# Altium PCB PCB.PcbDoc
Units mm, origin at the board's own origin, x right, y up, seen from the top; angles counter-clockwise.
Board outline 13.46 x 23.62 mm, 2 copper layers (Top Layer, Bottom Layer); 5 components, 18 nets, 53 pads, 1 vias.
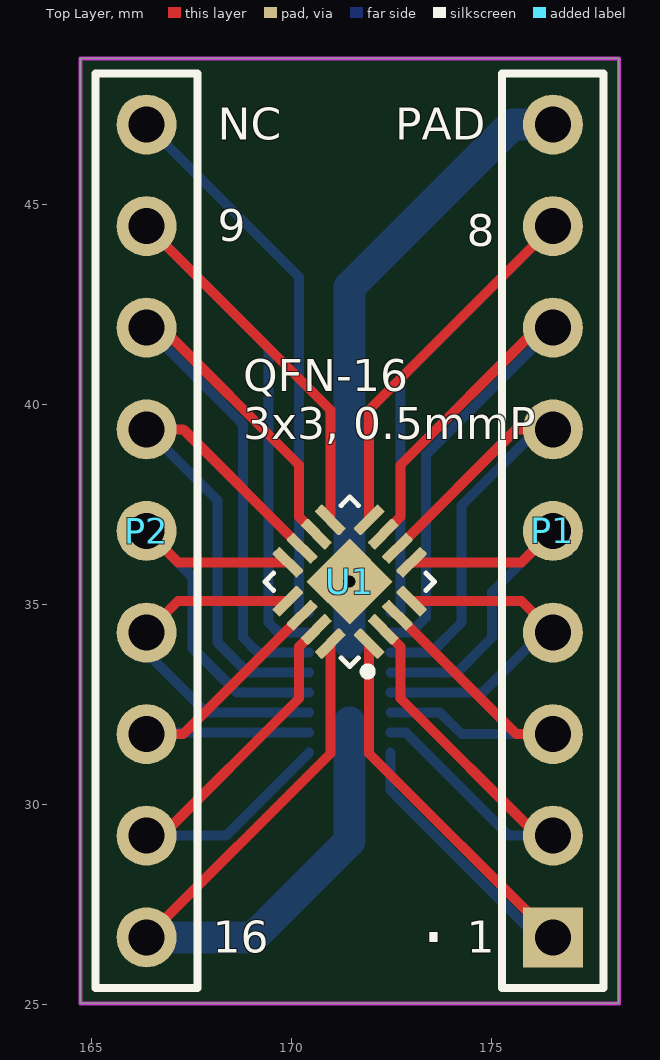
[diagram p0: Top Layer view]
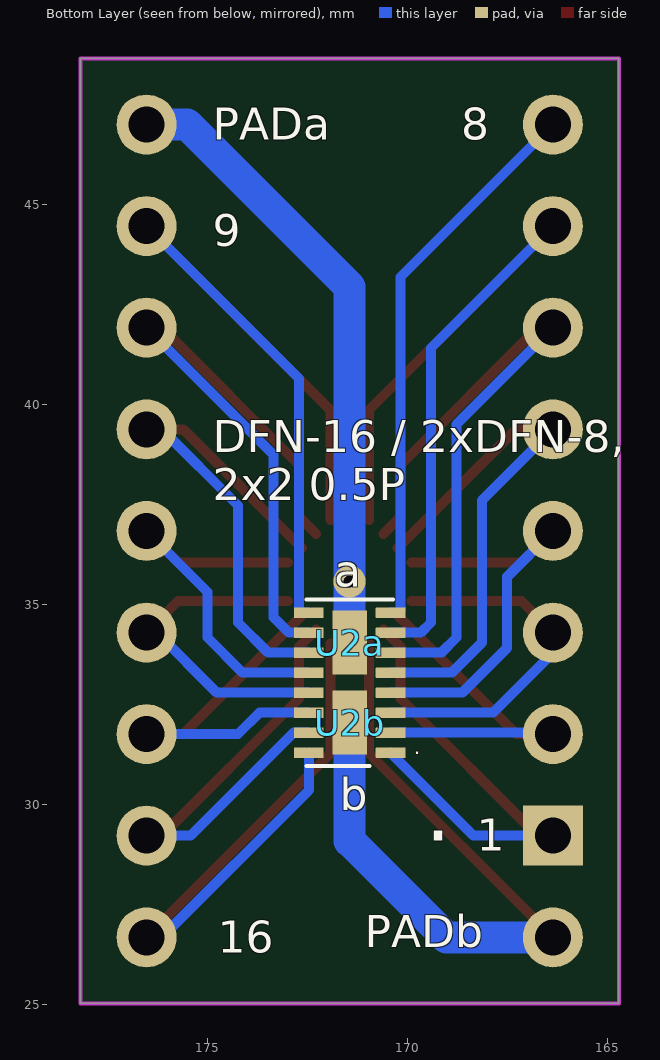
[diagram p1: Bottom Layer view, seen from below]

## Layer stack, top to bottom
Top Solder: solder mask 0.0102, Solder Resist, Dk 3.5
Top Layer: signal copper 0.0356
Dielectric 1: dielectric 0.32, FR-4, Dk 4.8
Bottom Layer: signal copper 0.0356
Bottom Solder: solder mask 0.0102, Solder Resist, Dk 3.5

## Board outline
164.719,48.641 178.181,48.641 178.181,25.019 164.719,25.019

## Design rules (kind name [scope] priority, off if disabled: settings)
Clearance [All] p1: gap=0.152 ignorepadtopadclearanceinfootprint=FALSE except(0: Arc-Hole Track-Hole SMDPad-Hole THPad-Hole Via-Hole Fill-Hole Poly-Hole Region-Hole Text-Hole)
HoleSize [All] p1: absolutevalues=TRUE maxlimit=6.2 minlimit=0.3 maxpercent=80.000 minpercent=20.000
MinimumSolderMaskSliver [All] p1: minsoldermaskwidth=0.1
PolygonConnect ViaConnect [IsVia] p1: connectstyle=Direct reliefconductorwidth=0.254 reliefentries=4 polygonreliefangle="90 Angle" airgapwidth=0.254
PolygonConnect [All] p2: connectstyle=Relief reliefconductorwidth=0.254 reliefentries=4 polygonreliefangle="90 Angle" airgapwidth=0.254
RoutingVias [All] p1: holewidth=0.3 width=0.6 viastyle="Through Hole" minholewidth=0.3 minwidth=0.5 maxholewidth=1 maxwidth=5
SilkToSilkClearance [All] p1: silktosilkclearance=0.1
SilkToSolderMaskClearance [IsPad] p1: minsilkscreentomaskgap=0.1 clearancetoexposedcopper=TRUE
SolderMaskExpansion [All] p1: expansion=0.051 istentingtop=FALSE
Width [All] p1: maxlimit=25.4 minlimit=0.15 preferedwidth=0.25
26 further rules are at their usual default settings.

## Components (designator, comment, footprint, x,y, rotation, side; value= is the part's Value field where it differs from the comment)
P1 "" HDR1X9#1 176.53,26.67 r90 top locked
P2 "" HDR1X9#2 166.37,46.99 r270 top
U1 "QFN-16-placeholder" QFN50P300X300X100-17N 171.45,35.56 r135 top
U2a "DFN-8-placeholder" SON50P200X200X60-9N 171.45,34.036 r0 bottom
U2b "DFN-8-placeholder" SON50P200X200X60-9N 171.45,32.036 r0 bottom

## Footprints (in the part's own frame and the unit in brackets; to place one, negate y for a bottom-side part, rotate by r counter-clockwise, add the part's x,y. Pads: shape width x height; smd on the part's side, far side on the other; paste and mask are expansions set on the pad)
HDR1X9#1 [mm] "Connector; Header; 9 Position"
  rect 1.5x1.5 / inner rect 1.5x1.5 / far side round 1.5 hole 0.9: 1(0,0)
  round 1.5 hole 0.9: 2(2.54,0) 3(5.08,0) 4(7.62,0) 5(10.16,0) 6(12.7,0) 7(15.24,0) 8(17.78,0) 9(20.32,0)
  silkscreen extent -1.27,-1.27 21.59,1.27
HDR1X9#2 [mm] "Connector; Header; 9 Position"
  round 1.5 / inner rect 1.5x1.5 / far side round 1.5 hole 0.9: 1(0,0)
  round 1.5 hole 0.9: 2(2.54,0) 3(5.08,0) 4(7.62,0) 5(10.16,0) 6(12.7,0) 7(15.24,0) 9(20.32,0)
  round 1.5 / inner round 1.5 / far side rect 1.5x1.5 hole 0.9: 8(17.78,0)
  silkscreen extent -1.27,-1.27 21.59,1.27
QFN50P300X300X100-17N [mm]
  rrect25% 0.86x0.26 smd mask+0.051: 1(-1.435,0.75) 2(-1.435,0.25) 3(-1.435,-0.25) 4(-1.435,-0.75) 9(1.435,-0.75) 10(1.435,-0.25) 11(1.435,0.25) 12(1.435,0.75)
  rrect25% 0.26x0.86 smd mask+0.051: 5(-0.75,-1.435) 6(-0.25,-1.435) 7(0.25,-1.435) 8(0.75,-1.435) 13(0.75,1.435) 14(0.25,1.435) 15(-0.25,1.435) 16(-0.75,1.435)
  rect 1.524x1.524 smd paste-0.31 mask+0.051: 17(0,0)
  silkscreen extent -2,-1.5 1.5,1.5, body extent -1.5,-1.5 1.5,1.5, height 1
SON50P200X200X60-9N [mm]
  rrect7% 0.74x0.26 smd mask+0.051: 1(-1.02,0.75) 2(-1.02,0.25) 3(-1.02,-0.25) 4(-1.02,-0.75) 5(1.02,-0.75) 6(1.02,-0.25) 7(1.02,0.25) 8(1.02,0.75)
  rect 0.864x1.6 smd mask+0.051: 9(0,0)
  silkscreen extent -1.08,-1.08 1.08,-1.08, body extent -1,-1 1,1, height 0.6

## Part data
P1 P2: library part "Header 9", "Header, 9-Pin", LatestRevisionDate=17-Jul-2002, LatestRevisionNote="Re-released for DXP Platform.", Publisher="Altium Limited"

## Via types
v1: diameter 0.8, hole 0.3, Top Layer to Bottom Layer, tented bottom, 1 vias

## Nets (pads, with @x,y where several pads share a name; then routed paths per layer and width w, separated by ;. In a path a pad name is that pad's centre, name@x,y a point inside that pad or via, vN(x,y) a via of type N, cw(c..) or ccw(c..) an arc to the next point about the centre after c; other vN are vias at no path point)
1: P1.1 U1.1 U2b.8 | length 15.8
  Top Layer w0.25: U1.1 171.934,31.266 P1.1
  Bottom Layer w0.25: U2b.8 172.47,30.349 176.149,26.67 P1.1
2: P1.2 U1.2 U2b.7 | length 12.3
  Top Layer w0.25: U1.2 172.72,33.936 172.72,32.639 176.149,29.21 P1.2
  Bottom Layer w0.25: U2b.7 172.857,31.786 175.433,29.21 P1.2
3: P1.3 U1.3 U2b.6 | length 9.4
  Top Layer w0.25: U1.3 175.614,31.75 P1.3
  Bottom Layer w0.25: U2b.6 173.708,32.286 174.244,31.75 P1.3
4: P1.4 U1.4 U2b.5 | length 8.5
  Top Layer w0.25: U1.4 175.744,35.076 P1.4
  Bottom Layer w0.25: U2b.5 174.772,32.786 176.276,34.29 P1.4
5: P1.5 U1.5 U2a.8 | length 10.1
  Top Layer w0.25: U1.5 175.744,36.044 P1.5
  Bottom Layer w0.25: U2a.8 174.129,33.286 175.006,34.163 175.006,35.306 P1.5
6: P1.6 U1.6 U2a.7 | length 13.2
  Top Layer w0.25: U1.6 175.614,39.37 P1.6
  Bottom Layer w0.25: U2a.7 173.486,33.786 174.244,34.544 174.244,37.465 176.149,39.37 P1.6
7: P1.7 U1.7 U2a.6 | length 16.7
  Top Layer w0.25: U1.7 172.72,37.184 172.72,38.481 176.149,41.91 P1.7
  Bottom Layer w0.25: U2a.6 172.97,34.286 173.355,34.671 173.355,38.735 P1.7
8: P1.8 U1.8 U2a.5 | length 20.7
  Top Layer w0.25: U1.8 171.934,39.854 P1.8
  Bottom Layer w0.25: U2a.5 172.708,34.786 172.72,34.798 172.72,40.64 P1.8
9: P1.9 U1.17 U2a.9 | length 15.7
  Bottom Layer w0.8: U2a.9 v1(171.45,35.56) 171.45,42.926 175.514,46.99 P1.9
10: P2.1 U2a.4 | length 14
  Bottom Layer w0.25: P2.1 170.18,43.18 170.18,34.798 170.192,34.786 U2a.4
11: P2.2 U1.9 U2a.3 | length 21.5
  Top Layer w0.25: P2.2 170.966,39.854 U1.9
  Bottom Layer w0.25: P2.2 169.418,41.402 169.418,34.544 169.676,34.286 U2a.3
12: P2.3 U1.10 U2a.2 | length 17.7
  Top Layer w0.25: P2.3 166.751,41.91 170.18,38.481 170.18,37.184 U1.10
  Bottom Layer w0.25: P2.3 168.783,39.497 168.783,34.163 169.16,33.786 U2a.2
13: P2.4 U1.11 U2a.1 | length 13.8
  Top Layer w0.25: P2.4 167.286,39.37 U1.11
  Bottom Layer w0.25: P2.4 168.148,37.592 168.148,34.036 168.898,33.286 U2a.1
14: P2.5 U1.12 U2b.4 | length 10.6
  Top Layer w0.25: P2.5 167.156,36.044 U1.12
  Bottom Layer w0.25: P2.5 167.513,35.687 167.513,33.909 168.636,32.786 U2b.4
15: P2.6 U1.13 U2b.3 | length 9
  Top Layer w0.25: P2.6 167.156,35.076 U1.13
  Bottom Layer w0.25: P2.6 166.37,33.782 167.866,32.286 U2b.3
16: P2.7 U1.14 U2b.2 | length 9.2
  Top Layer w0.25: P2.7 167.286,31.75 U1.14
  Bottom Layer w0.25: P2.7 166.406,31.786 U2b.2
17: P2.8 U1.15 U2b.1 | length 12.1
  Top Layer w0.25: P2.8 166.751,29.21 170.18,32.639 170.18,33.936 U1.15
  Bottom Layer w0.25: P2.8 168.354,29.21 U2b.1
18: P2.9 U1.16 U2b.9 | length 18.3
  Top Layer w0.25: P2.9 170.966,31.266 U1.16
  Bottom Layer w0.8: P2.9 169.037,26.67 171.45,29.083 U2b.9

## Keep-outs
Keep-Out Layer:
  the board outline again, w0.1

## Silkscreen, mask and mechanical layers (free items; w line width, h text height)
Top Overlay:
  text "NC" at 168.148,46.609 h0.8
  text "PAD" at 172.593,46.609 h0.8
  text "9" at 168.148,44.069 h0.8
  text "8" at 174.371,43.942 h0.8
  text "QFN-16  / 3x3, 0.5mmP" at 168.783,39.116 h0.8
  text "." at 173.228,26.543 h1.5
  text "16" at 168.021,26.289 h0.8
  text "1" at 174.371,26.289 h0.8
Bottom Overlay:
  text "8" at 168.656,46.609 h0.8
  text "PADa" at 174.879,46.609 h0.8
  text "9" at 174.879,43.942 h0.8
  text "DFN-16 / 2xDFN-8, / 2x2 0.5P" at 174.879,37.592 h0.8
  text "a" at 171.831,35.433 h0.8
  text "." at 169.672,31.242 h0.4
  text "b" at 171.704,29.845 h0.8
  text "." at 168.91,29.083 h1.5
  text "1" at 168.275,28.829 h0.8
  text "PADb" at 171.069,26.416 h0.8
  text "16" at 174.752,26.289 h0.8